# Altium PCB PCB_LICH_VAN_NIEN.PcbDoc
Units mm, origin at the board's own origin, x right, y up, seen from the top; angles counter-clockwise.
Board outline 116.84 x 103.38 mm, 2 copper layers (Top Layer, Bottom Layer); 35 components, 44 nets, 158 pads, 53 vias.
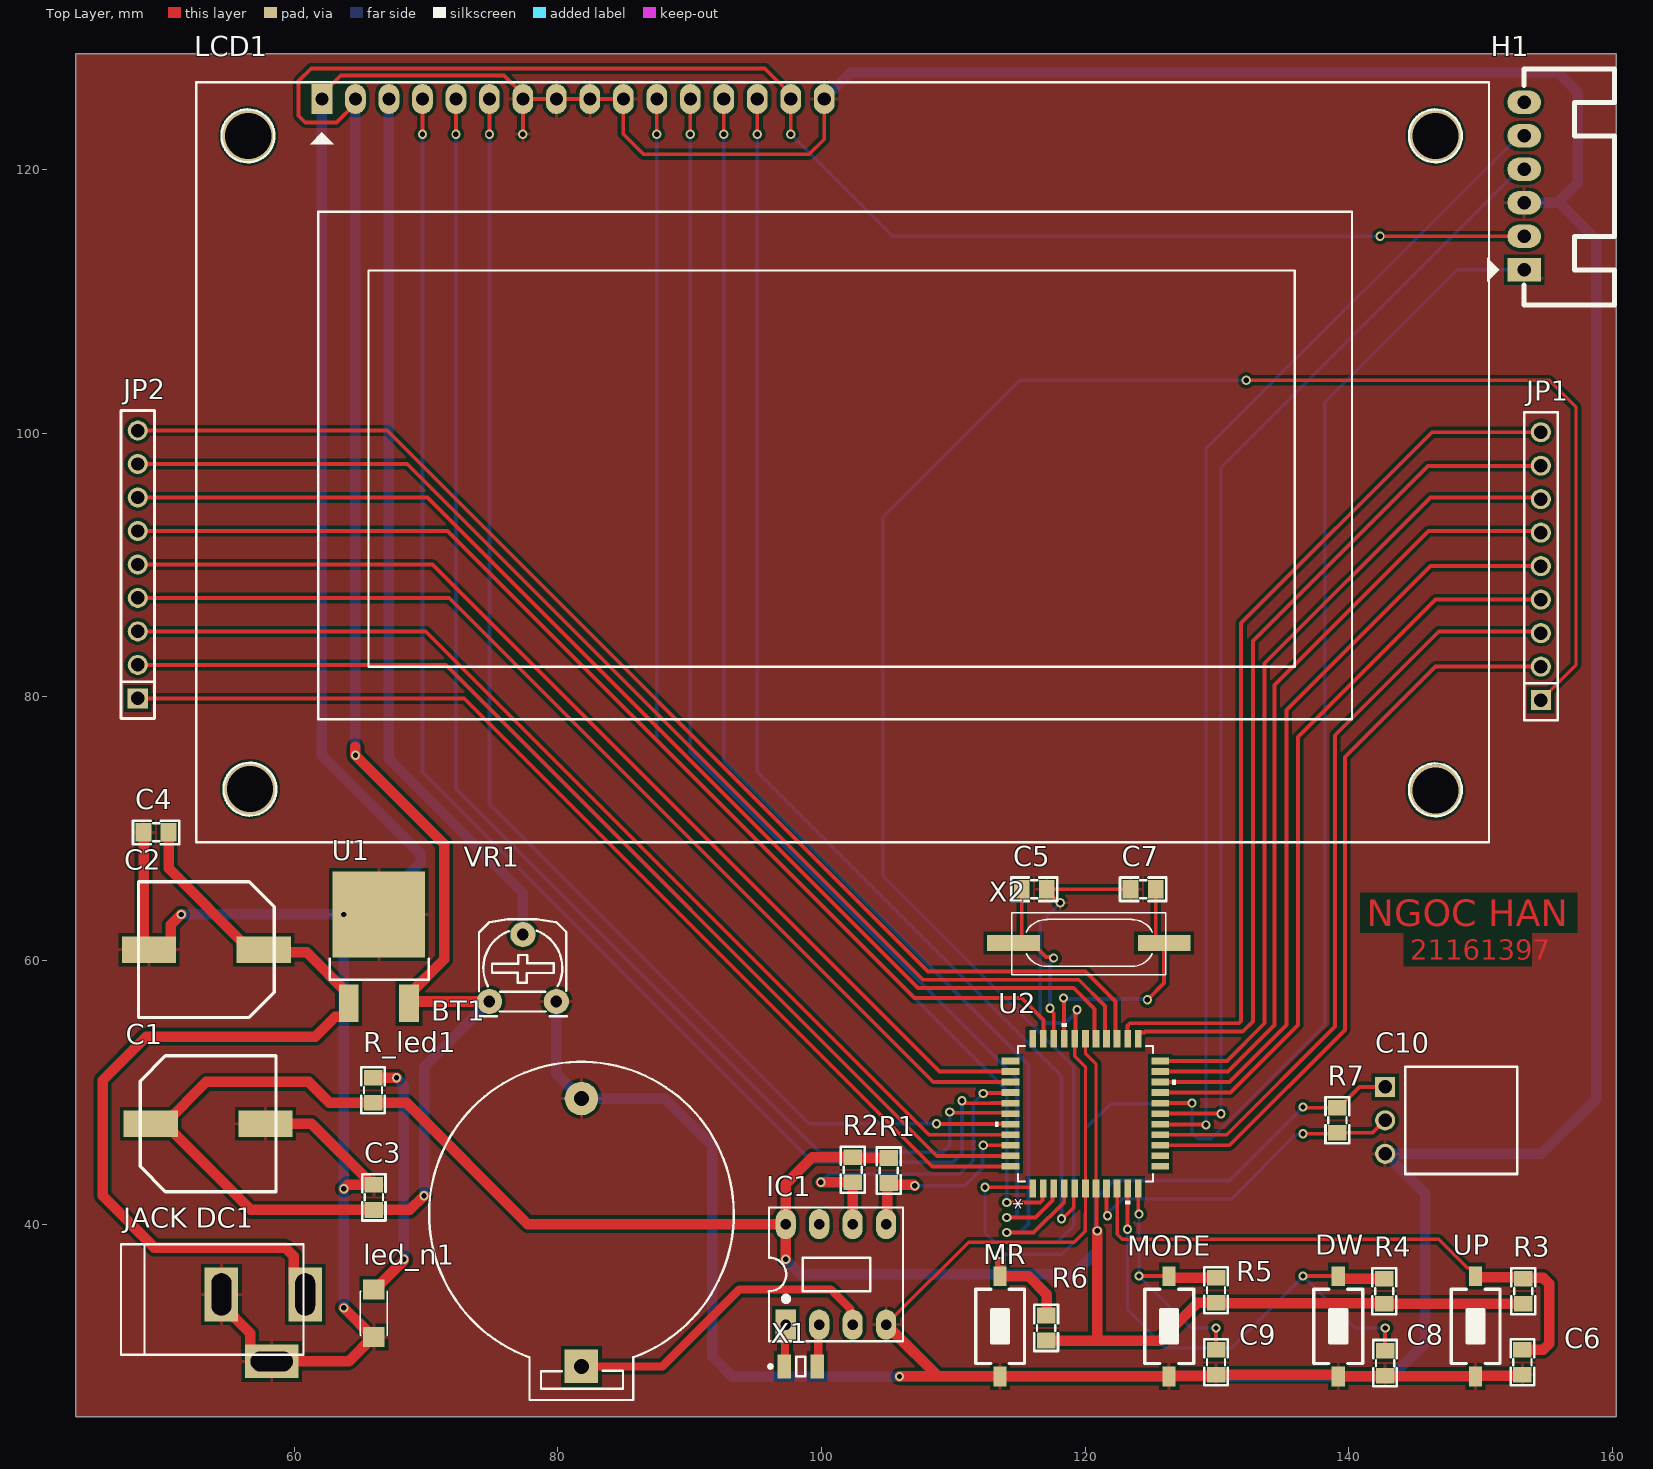
[diagram p0: Top Layer view]
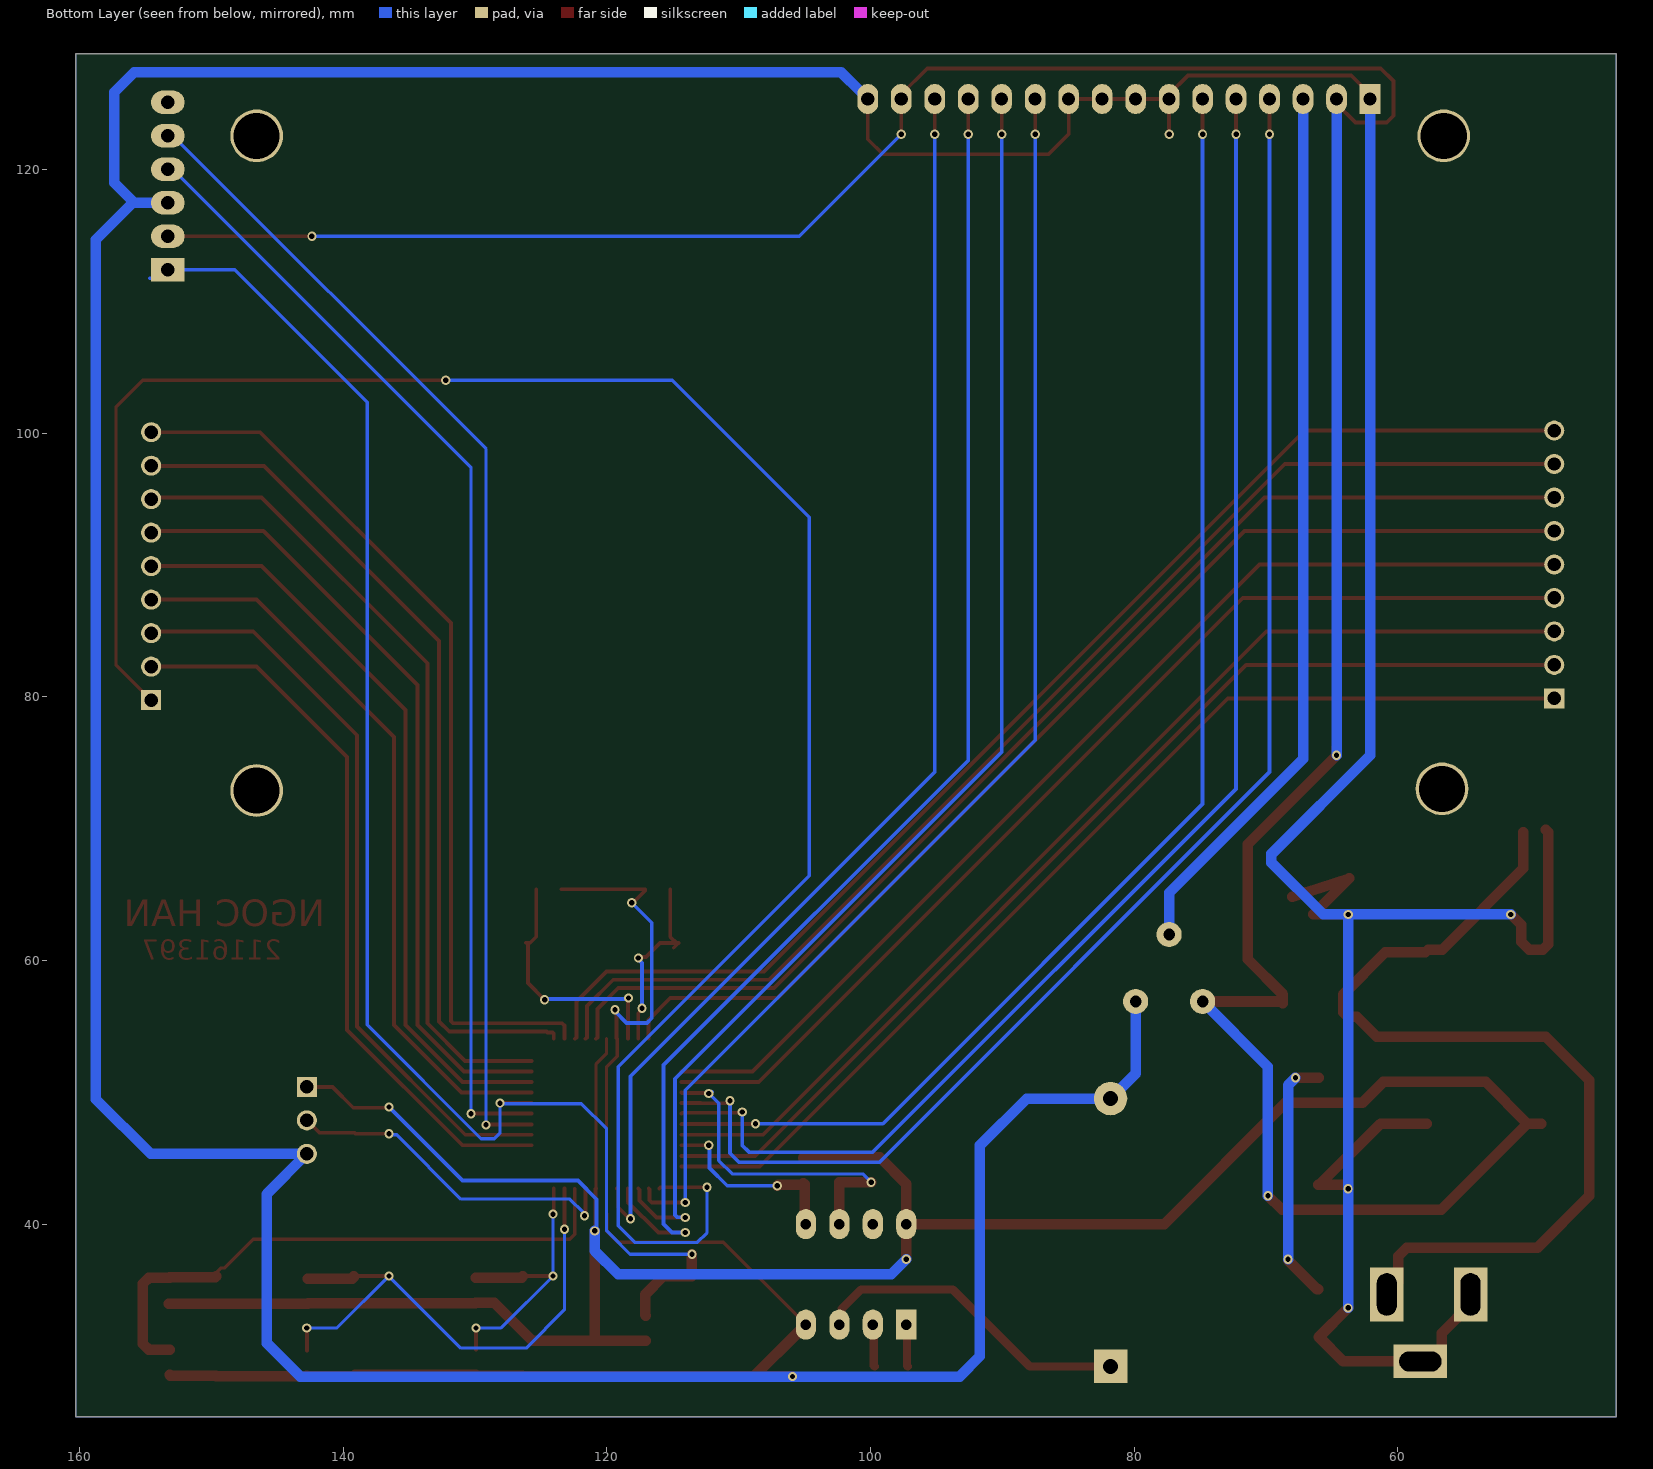
[diagram p1: Bottom Layer view, seen from below]
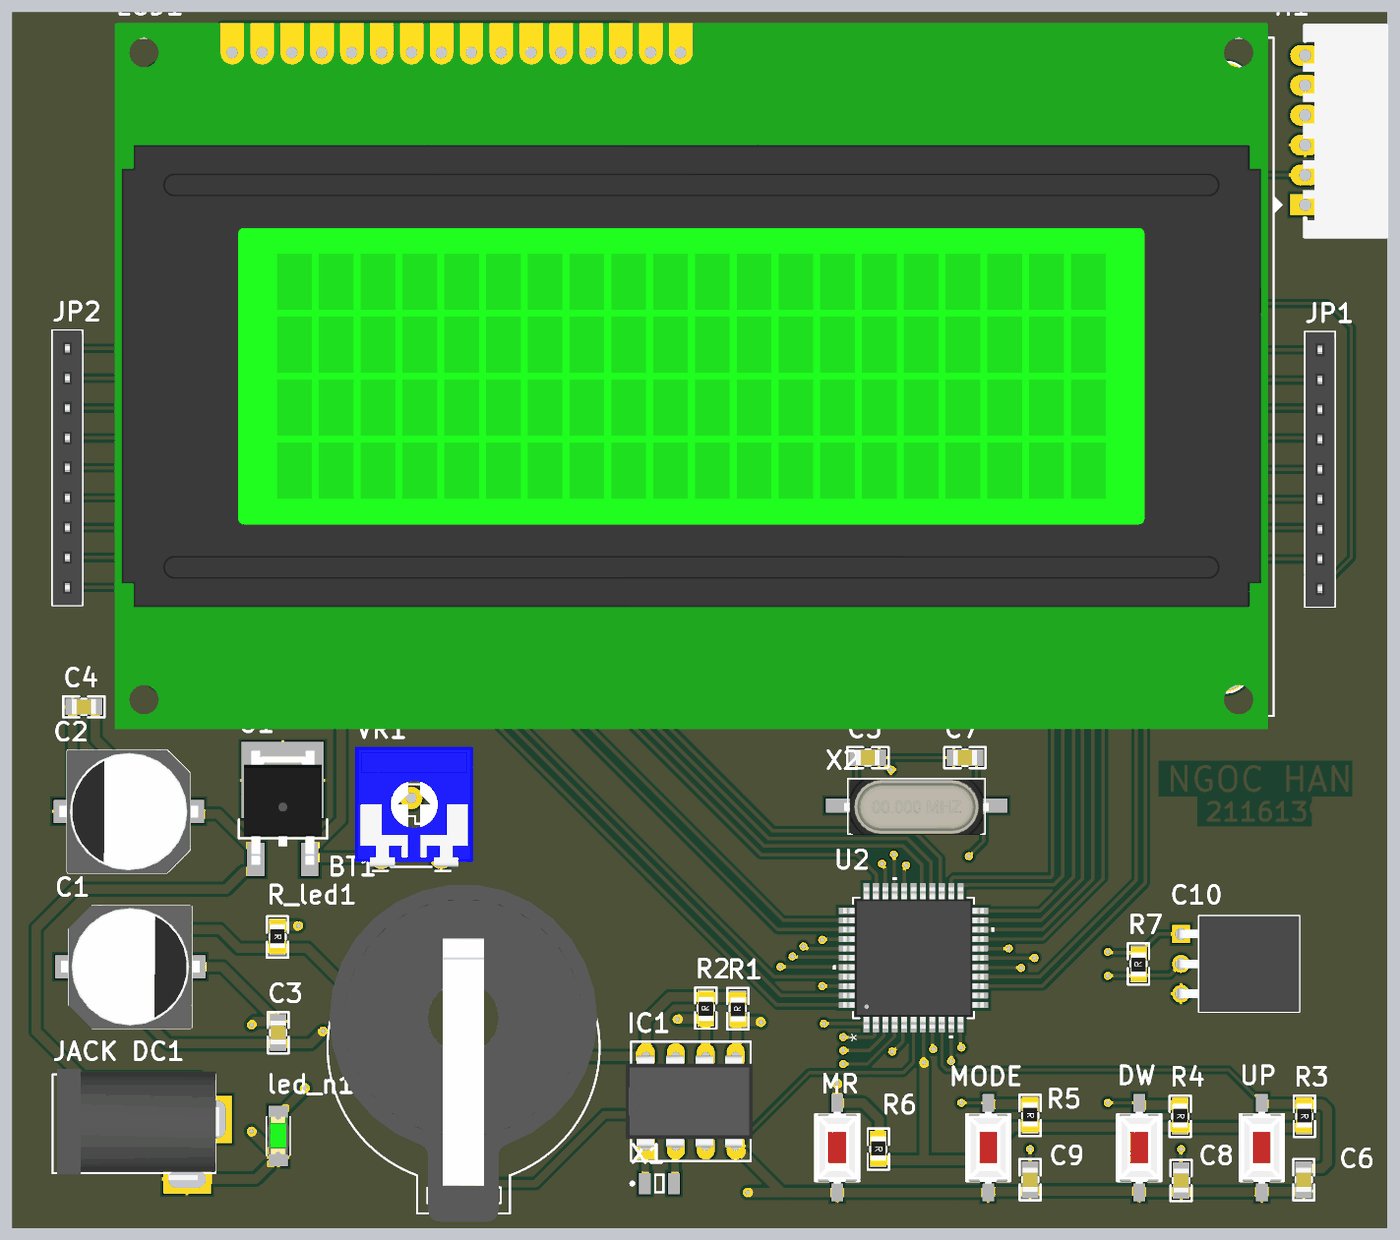
[diagram p2: 3D render of the assembled board from above, using the file's embedded part models]

## Layer stack, top to bottom
Top Solder: solder mask 0.0102, Solder Resist, Dk 3.5
Top Layer: signal copper 0.0356
Dielectric 1: dielectric 0.32, FR-4, Dk 4.8
Bottom Layer: signal copper 0.0356
Bottom Solder: solder mask 0.0102, Solder Resist, Dk 3.5

## Board outline
43.434,25.4 160.274,25.4 160.274,128.778 43.434,128.778

## Design rules (kind name [scope] priority, off if disabled: settings)
Clearance [All] p1: gap=0.254 ignorepadtopadclearanceinfootprint=FALSE
HoleSize [All] p1: absolutevalues=TRUE maxlimit=0.381 minlimit=0.127 maxpercent=80.000 minpercent=20.000
PolygonConnect [All] p1: connectstyle=Relief reliefconductorwidth=0.254 reliefentries=4 polygonreliefangle="90 Angle" airgapwidth=0.254
RoutingVias [All] p1: holewidth=0.4 width=0.7 viastyle="Through Hole" minholewidth=0.4 minwidth=0.7 maxholewidth=0.4 maxwidth=0.7
SolderMaskExpansion [All] p1: expansion=0.102 istentingtop=FALSE
Width [All] p1: maxlimit=0.8 minlimit=0.25 preferedwidth=0.29
29 further rules are at their usual default settings.

## Classes and differential pairs
component class SCH_LICH_VAN_NIEN: BT1 C1 C2 C3 C4 C5 C6 C7 C8 C9 C10 DW H1 H? IC1 "JACK DC1" JP1 JP2 led_n1 MODE MR R1 R2 R3 R4 R5 R6 R7 R_led1 U1 UP X1 X2

## Components (designator, comment, footprint, x,y, rotation, side; value= is the part's Value field where it differs from the comment)
BT1 "PIN 3V" PIN3V 81.788,29.21 r90 top
C1 "1000uF" "tu nhom 10 (G)" 53.467,47.625 r0 top
C2 "1000uF" "tu nhom 10 (G)" 53.34,60.833 r180 top
C3 "104" "tu 0805" 66.04,42.037 r90 top
C4 "104" "tu 0805" 49.53,69.723 r180 top
C5 "104" "tu 0805" 116.135,65.408 r180 top
C6 "104" "tu 0805" 153.165,29.534 r270 top
C7 "104" "tu 0805" 124.39,65.408 r0 top
C8 "104" "tu 0805" 142.748,29.464 r270 top
C9 "104" "tu 0805" 129.924,29.534 r270 top
C10 "DHT11" JP3-C1C 142.748,47.879 r270 top
DW "SW" "BUTTON-SMD 2PIN" 139.192,32.258 r90 top (schematic designator S2)
H1 "Header 6P 2.54 Duc Cong" "Header 6P DC 2.54" 153.289,112.395 r0 top
IC1 "DS1307" DIP8 100.965,36.195 r0 top
"JACK DC1" "JACK DC 5.5" "JACK DC 5.5" 57.658,32.131 r0 top value="Jac DC"
JP1 "JP 1x9 2.54" "JP 1x9 CT" 154.559,89.916 r90 top
JP2 "JP 1x9 2.54" "JP 1x9 CT" 48.133,90.043 r90 top
LCD1 "LCD 20x4A" LCD20X4A 62.103,125.349 r0 top
led_n1 "LED 0805" LED-1206-Green 66.042,35.052 r270 top
MODE "SW" "BUTTON-SMD 2PIN" 126.365,32.258 r90 top (schematic designator S3)
MR "SW" "BUTTON-SMD 2PIN" 113.538,32.258 r90 top (schematic designator S4)
R1 "4.7k" "tro smd 0805" 105.029,44.069 r90 top
R2 "4.7k" "tro smd 0805" 102.301,44.126 r90 top
R3 "4.7k" "tro smd 0805" 153.289,34.925 r270 top
R4 "4.7k" "tro smd 0805" 142.748,34.925 r270 top
R5 "4.7k" "tro smd 0805" 129.982,34.995 r270 top
R6 "4.7k" "tro smd 0805" 117.094,32.131 r270 top
R7 "4.7k" "tro smd 0805" 139.065,47.879 r90 top
R_led1 "1k" "tro smd 0805" 66.04,50.165 r270 top
U1 "L7805CDT-TR" DPAK_118_446_112X59_SMD 66.294,60.773 r90 top
U2 "PIC16F887-IPTVAO" TQFP44_PT_MCH 120.015,48.387 r90 top
UP "SW" "BUTTON-SMD 2PIN" 149.606,32.258 r90 top (schematic designator S1)
VR1 "10k" VR-S2 74.803,56.896 r0 top
X1 "32768hz" XT2-32.768KHz-2_V 98.425,29.21 r0 top value=4Mhz
X2 "20Mhz" XTAL-RU49/4 125.222,61.341 r180 top value=4Mhz

## Footprints (in the part's own frame and the unit in brackets; to place one, negate y for a bottom-side part, rotate by r counter-clockwise, add the part's x,y. Pads: shape width x height; smd on the part's side, far side on the other; paste and mask are expansions set on the pad)
"BUTTON-SMD 2PIN" [mm] "Switch SMD type"
  rect 1.5x1 smd: 1(-3.8,0) 2(3.8,0)
  silkscreen extent -2.82,-1.85 2.82,1.85, body extent -3.05,-1.85 3.05,1.85, height 2.5
DIP8 [mil] "DIP, 8-Leads, Row Spacing 7.62mm, Pitch 2.54mm, Body 9.91x6.73mm"
  rect 60x90 hole 31: 1(-145,-150)
  oval 60x90 hole 31: 2(-45,-150) 3(55,-150) 4(155,-150) 5(155,150) 6(55,150) 7(-45,150) 8(-145,150)
  silkscreen extent -195,-200 205,200, body extent -213,-153 213,153, height 177
DPAK_118_446_112X59_SMD [mm] "CASE: DPAK"
  rect 2.85x1.5 smd: 1(-4.023,2.163) 3(-4.023,-2.417)
  rect 6.5x7 smd: 2(2.727,-0.127)
  silkscreen extent -2.22,-3.9 -0.62,3.6, body extent -4.47,-3.43 5.23,3.15, height 2.3
"Header 6P DC 2.54" [mil]
  rect 100x70 hole 40: 1(0,0)
  oval 100x70 hole 40: 2(0,100) 3(0,200) 4(0,300) 5(0,400) 6(0,500)
  silkscreen extent -110,-105 270,600, body extent -7,-110 278,605, height 227
"JACK DC 5.5" [mm] "Jac DC input"
  rect 2.54x4.064 hole 1.5 slot 3.2 at 90 deg: 1(3.175,2.54) 2(-3.175,2.54)
  rect 4.064x2.54 hole 1.5 slot 3.2 at 0 deg: 3(0.635,-2.54)
  silkscreen extent -10.79,-2.03 3.05,6.35, body extent -10.42,-2.67 3.4,6.84, height 11.02
JP3-C1C [mm] "03p 1 row Right angle"
  rect 1.52x1.52 hole 1.02: 1(-2.54,0)
  round 1.52 hole 1.02: 2(0,0) 3(2.54,0)
  silkscreen extent -4.06,1.52 4.06,10.03, body extent -4.06,-0.25 4.06,10.05, height 2.51
"JP 1x9 CT" [mm] "9 row, straight, gold plating"
  rect 1.52x1.52 hole 1.02: 1(-10.16,0)
  round 1.52 hole 1.02: 2(-7.62,0) 3(-5.08,0) 4(-2.54,0) 5(0,0) 6(2.54,0) 7(5.08,0) 8(7.62,0) 9(10.16,0)
  silkscreen extent -11.68,-1.27 11.68,1.27, body extent -11.68,-1.25 11.68,1.25, height 8.51
LCD20X4A [mil] "LCD dipslay 20x4, 16 pin"
  rect 62x90 hole 39: 1(0,0)
  oval 62x90 hole 39: 2(100,0) 3(200,0) 4(300,0) 5(400,0) 6(500,0) 7(600,0) 8(700,0) 9(800,0) 10(900,0) 11(1000,0) 12(1100,0) 13(1200,0) 14(1300,0) 15(1400,0) 16(1500,0)
  round 157.48 hole 137.8: "Hole 0"(-220,-110) "Hole 0"(-215,-2060) "Hole 0"(3325,-2065) "Hole 0"(3325,-110)
  silkscreen extent -375,-2220 3485,50, body extent -392,-2264 3466,98, height 417
LED-1206-Green [mil]
  rect 60x65 smd: 1(0,0) 2(142,0)
  silkscreen extent 6,-40 136,40, body extent 7,-31 133,32, height 43
PIN3V [mil] "Socket PIN 3V"
  rect 100x100 hole 45: 1(0,0)
  round 100 hole 45: 2(800,0)
  silkscreen extent -100,-455 910,455, body extent -128,-447 1002,449, height 278
TQFP44_PT_MCH [mil]
  rect 53x20 smd paste+0 mask+0: 1(-223.5,157.48) 2(-223.5,125.98) 3(-223.5,94.49) 4(-223.5,62.99) 5(-223.5,31.5) 6(-223.5,0) 7(-223.5,-31.5) 8(-223.5,-62.99) 9(-223.5,-94.49) 10(-223.5,-125.98) 11(-223.5,-157.48) 23(223.5,-157.48) 24(223.5,-125.98) 25(223.5,-94.49) 26(223.5,-62.99) 27(223.5,-31.5) 28(223.5,0) 29(223.5,31.5) 30(223.5,62.99) 31(223.5,94.49) 32(223.5,125.98) 33(223.5,157.48)
  rect 20x53 smd paste+0 mask+0: 12(-157.48,-223.5) 13(-125.98,-223.5) 14(-94.49,-223.5) 15(-62.99,-223.5) 16(-31.5,-223.5) 17(0,-223.5) 18(31.5,-223.5) 19(62.99,-223.5) 20(94.49,-223.5) 21(125.98,-223.5) 22(157.48,-223.5) 34(157.48,223.5) 35(125.98,223.5) 36(94.49,223.5) 37(62.99,223.5) 38(31.5,223.5) 39(0,223.5) 40(-31.5,223.5) 41(-62.99,223.5) 42(-94.49,223.5) 43(-125.98,223.5) 44(-157.48,223.5)
  silkscreen extent -270,-270 270,270, body extent -236,-236 236,236, height 47
"tro smd 0805" [mm]
  rect 1.2x1.4 smd: 1(-0.946,-0.061) 2(0.954,-0.061)
  silkscreen extent -1.75,-0.97 1.75,0.84, body extent -1.56,-0.76 1.44,0.64, height 0.53
"tu 0805" [mm] "Compoment SMD 80x50mil"
  rect 1.2x1.4 smd: 1(-0.946,-0.003) 2(0.954,-0.003)
  silkscreen extent -1.75,-0.89 1.75,0.89, body extent -1.01,-0.64 1.01,0.63, height 0.61
"tu nhom 10 (G)" [mm]
  rect 4.1x2 smd: 1(-4.35,0) 2(4.35,0)
  silkscreen extent -5.15,-5.15 5.15,5.15, body extent -5.9,-5.25 5.9,5.25, height 10.5
VR-S2 [mil] "Resistor Variable"
  round 75 hole 35: 1(0,0) 2(100,200) 3(200,0)
  silkscreen extent -31,-44 231,246, body extent -87,-30 307,372, height 165
XT2-32.768KHz-2_V [mm] "Hand Drawn, 2-Leads, Body 3.2x1.5mm, Pitch 2.5mm"
  rect 1x1.8 smd: 1(-1.25,0) 2(1.25,0)
  silkscreen extent -2.42,-0.75 0.35,0.75, body extent -1.6,-0.75 1.6,0.75, height 0.9
XTAL-RU49/4 [mm]
  rect 4x1.2 smd: 1(-0.762,0) 2(10.668,0)
  silkscreen extent -0.89,-2.29 10.79,2.41, body extent -1.2,-2.22 11.1,2.48, height 4.3

## Part data
BT1: "Battery 3VDC"
C1 C2: library part "Tu Nhom 1000uF 16V", "Dán", Chung_Loai=Dán, Don_Vi=Con, Ma_Hang=MH004419, So_Chan=2, Ten_Linh_Kien="Tụ Nhôm 1000uF 16V 10x10MM"
C3 C4 C5 C6 C7 C8 C9: library part "Tu 0805 104 50V 10%", "Dán", Chung_Loai=Dán, Don_Vi=Con, Ma_Hang=MH004551, So_Chan=2, Ten_Linh_Kien="Tụ 0805 104-100nF 10% 50V"
C10: library part JP3, "WR-PHD 2.54 mm Angled Socket Header", Manufacturer="W¨¹rth Elektronik eiSos GmbH", partNo=613003143121, ComponentLink1 Description=Manufacturer, ComponentLink1URL=http://www.we-online.com, ComponentLink2 Description=Datasheet, ComponentLink2URL=http://katalog.we-online.de/em/datasheet/6130xx143121.pdf, Created by="Karrer Zheng", Created Date="29 March 2013", NoPins=03
DW MODE MR UP: library part SW-Button, "Switch-Button", LatestRevisionDate=17-Jul-2002, LatestRevisionNote="Re-released for DXP Platform.", PackageReference=SPST-2, Published=24-Mar-1999, Publisher="Altium Limited"
H1: "Cắm", Chung_Loai=Cắm, Don_Vi=Con, Ma_Hang=MH003363, Ten_Linh_Kien="Header 6P XH2.54-6P Đực Cong"
IC1: "Real Timer Serial"
JP1 JP2: library part "JP 1x9 2.54 Cai Thang", "Cắm", Chung_Loai=Cắm, Don_Vi=Con, Ma_Hang=MH004006, Ten_Linh_Kien="Jump Đơn Cái 2.54MM 1x20P Thẳng"
LCD1: library part LCD20x4A, "LCD dipslay 20 char, 4 line"
led_n1: library part "LED 1206 Xanh La", "Dán", Chung_Loai=Dán, Don_Vi=Con, Ma_Hang=MH002947, Ten_Linh_Kien="LED1206 Màu Xanh Lá (Green)"
R1 R2 R3 R4 R5 R6 R7 R_led1: library part "Tro 0805 5% 4.7k", "Dán", Chung_Loai=Dán, Don_Vi=Con, Ma_Hang=MH005307, So_Chan=2, Ten_Linh_Kien="Trở 0805 5% 4.7k"
U1: library part REG_35V_5V-1.5A-7.5W-DPAK_2, "Linear Voltage Regulator IC 1 Output 1.5A DPAK", Alternate Part Number-1="CJ7805 3%", Case/Package=DPAK, Manufacturer=Diodes, Manufacturer Part Number=L7805CDT-TR, Supplier Part Number-1=L7805CDT-TR, Supplier-1="SP ROAD"
U2: "No Description Available", Mfr_Name=Microchip, RefDes=RefDes, Type=Type
VR1: library part "Resistor Var"
X1 X2: library part XT2, "Crystal, 32.768 KHz, -40 to 85 degC, 3.2 x 1.5 x 0.9 mm SMD"

## Via types
v1: diameter 0.7, hole 0.4, Top Layer to Bottom Layer, 53 vias

## Nets (pads, with @x,y where several pads share a name; then routed paths per layer and width w, separated by ;. In a path a pad name is that pad's centre, name@x,y a point inside that pad or via, vN(x,y) a via of type N, cw(c..) or ccw(c..) an arc to the next point about the centre after c; other vN are vias at no path point)
CLK: H1.5 U2.16 | length 88.7
  Top Layer w0.29: U2.16 125.717,47.562 129.134,47.562 v1(129.159,47.536)
  Bottom Layer w0.25: v1(129.159,47.536) 129.159,98.806 152.908,122.555 H1.5
DAT: H1.4 U2.17 | length 86
  Top Layer w0.29: U2.17 v1(130.302,48.387)
  Bottom Layer w0.25: v1(130.302,48.387) 130.302,97.409 152.908,120.015 H1.4
DATA: C10.2 R7.1 U2.8 | length 26.2
  Top Layer w0.29: U2.8 121.615,40.715 v1(121.69,40.64) ; v1(136.525,46.863) 139.055,46.863 R7.1 141.802,46.933 C10.2
  Bottom Layer w0.25: v1(121.69,40.64) 121.69,40.762 121.793,40.864 121.793,40.894 122.809,41.91 131.064,41.91 135.931,46.777 136.439,46.777 v1(136.525,46.863)
EN: LCD1.6 U2.40 | length 103.1
  Top Layer w0.29: v1(74.803,122.682) LCD1.6 ; v1(108.712,47.625) 108.731,47.606 114.319,47.606 U2.40
  Bottom Layer w0.29: v1(74.803,122.682) 74.803,71.882 99.06,47.625 v1(108.712,47.625)
GND: "JACK DC1.2" "JACK DC1.3" BT1.2 C1.2 C2.2 C3.2 C4.2 C5.1 C6.2 C7.1 C8.2 C9.2 C10.3 DW.1 H1.3 IC1.4 LCD1.1 LCD1.7 LCD1.8 LCD1.9 LCD1.10 LCD1.16 led_n1.2 MODE.1 MR.1 U1.2 U2.6 U2.29 UP.1 VR1.3 | length 590
  Top Layer w0.254: IC1.4 104.902,32.422 105.489,33.009 105.526,33.009 111.156,38.639 119.157,38.639 119.996,39.478 119.996,40.811 120.015,40.831 U2.6 120.015,51.943 119.215,52.743 U2.29 ; C5.1 117.087,65.405 C7.1
  Top Layer w0.29: LCD1.1 62.103,125.705 63.525,127.127 75.921,127.127 77.343,125.705 LCD1.7 ; v1(77.343,122.682) LCD1.7 ; LCD1.16 100.203,122.301 99.06,121.158 86.487,121.158 84.963,122.682 LCD1.10 LCD1.9 LCD1.8 LCD1.7 ; C5.1 117.08,65.312 118.003,64.389 v1(118.103,64.389) ; U2.29 119.253,54.102 119.253,56.023 119.38,56.15 v1(119.38,56.261)
  Top Layer w0.8: C4.2@48.776,69.926 C4.2 48.576,61.247 C2.2 50.04,60.833 50.64,61.433 50.64,62.705 v1(51.435,63.5) ; 54.483,35.433 54.483,34.671 54.483,33.909 56.661,31.731 56.661,30.461 57.531,29.591 58.293,29.591 64.124,29.591 65.978,31.445 v1(63.768,33.655) ; C1.2 61.31,47.625 C3.2@65.943,42.991 ; v1(63.754,63.5) U1.2 63.691,66.23 66.962,65.171 U1.2@68.004,64.833 ; v1(63.768,42.686) 64.073,42.991 C3.2@65.943,42.991 ; C3.2 C3.2@65.943,42.991 ; IC1.4 104.902,32.2 105.236,31.865 105.422,31.865 108.829,28.458 ; v1(105.918,28.448) 105.928,28.458 108.829,28.458 ; C6.2 153.101,28.519 149.667,28.519 UP.1 149.58,28.484 142.77,28.484 C8.2 142.719,28.484 139.218,28.484 DW.1 139.192,28.48 139.092,28.58 C9.2 129.86,28.519 126.426,28.519 MODE.1 MR.1 108.829,28.458
  Bottom Layer w0.29: v1(118.103,64.389) 116.586,62.872 116.586,55.626 116.954,55.258 118.504,55.258 118.891,55.645 118.891,55.661 119.38,56.15 v1(119.38,56.261)
  Bottom Layer w0.8: v1(51.435,63.5) v1(63.754,63.5) ; LCD1.1 62.103,75.565 69.582,68.086 69.582,67.423 65.659,63.5 v1(63.754,63.5) ; v1(63.768,33.655) v1(63.768,42.686) 63.768,63.486 v1(63.754,63.5) ; VR1.3 79.883,51.435 BT1.2 88.138,49.53 91.694,45.974 91.694,29.972 93.218,28.448 v1(105.918,28.448) 143.256,28.448 145.796,30.988 145.796,42.291 C10.3 154.598,45.339 158.75,49.491 158.75,114.681 155.956,117.475 155.829,117.475 ; LCD1.16 100.203,125.495 100.561,125.853 100.707,125.853 102.235,127.381 155.829,127.381 157.353,125.857 157.353,118.999 155.829,117.475 ; H1.3 155.829,117.475
MCLR: H1.1 MR.2 R6.1 U2.18 | length 118
  Top Layer w0.29: U2.18 v1(128.105,49.187)
  Top Layer w0.8: v1(113.538,37.719) MR.2 115.707,36.058 117.094,34.671 117.094,33.137 R6.1
  Bottom Layer w0.25: v1(113.538,37.719) 118.237,37.719 119.634,39.116 120.015,39.497 120.015,47.244 121.92,49.149 128.067,49.149 v1(128.105,49.187) 128.105,46.901 128.524,46.482 129.54,46.482 138.176,55.118 138.176,102.362 148.209,112.395 H1.1 153.924,111.76 154.686,111.76
NetBT1_1: BT1.1 IC1.3 | length 24.7
  Top Layer w0.635: BT1.1 87.916,29.21 93.758,35.052 100.711,35.052 102.192,33.571 102.192,32.555 IC1.3
NetC2_1: "JACK DC1.1" C2.1 C4.1 U1.1 | length 71.7
  Top Layer w0.8: C4.1 50.476,66.997 56.64,60.833 C2.1 57.907,60.616 60.94,60.616 64.131,57.425 U1.1 64.131,56.075 63.781,55.725 63.106,55.725 61.61,54.229 48.768,54.229 45.466,50.927 45.466,42.164 49.403,38.227 59.309,38.227 59.963,37.573 59.963,35.541 60.833,34.671 60.833,35.433
NetC5_2: C5.2 U2.31 X2.2 | length 15.3
  Top Layer w0.254: X2.2 X2.2@114.935,60.96 ; X2.2@114.707,61.341 115.18,61.814 C5.2 ; X2.2@114.738,61.344 X2.2@115.18,61.787
  Top Layer w0.29: X2.2 114.707,61.341 115.954,61.341 117.019,60.276 117.524,60.276 v1(117.602,60.198) ; v1(117.335,56.388) 117.335,56.277 117.609,56.004 117.609,54.07 U2.31
  Bottom Layer w0.29: v1(117.335,56.388) 117.335,59.82 117.602,60.087 v1(117.602,60.198)
NetC6_1: C6.1 R3.1 U2.9 UP.2 | length 44.7
  Top Layer w0.254: U2.9 122.421,42.704 122.421,39.25 122.809,38.862 146.802,38.862 148.983,36.681 149.233,36.681 149.606,36.308 UP.2
  Top Layer w0.8: UP.2 149.7,35.964 153.134,35.964 153.158,35.941 154.725,35.941 155.194,35.472 155.194,30.949 154.725,30.48 C6.1
NetC7_2: C7.2 U2.30 X2.1 | length 19
  Top Layer w0.254: C7.2 125.344,61.814 125.817,61.341 X2.1 ; X2.1@125.984,61.344 X2.1@126.168,61.344
  Top Layer w0.29: v1(118.351,57.163) 118.383,57.131 118.383,54.096 U2.30 ; v1(124.714,57.023) 125.984,58.293 X2.1
  Bottom Layer w0.29: v1(118.351,57.163) 118.421,57.093 124.644,57.093 v1(124.714,57.023)
NetC8_1: C8.1 DW.2 R4.1 U2.10 | length 41.9
  Top Layer w0.29: v1(123.21,39.613) 123.213,39.616 123.213,42.708 U2.10 ; v1(136.525,36.068) 139.182,36.068 DW.2 ; C8.1 142.748,30.413 v1(142.748,32.131)
  Top Layer w0.8: DW.2 139.192,35.971 139.292,35.871 R4.1
  Bottom Layer w0.25: v1(123.21,39.613) 123.21,33.508 126.111,30.607 131.064,30.607 v1(136.525,36.068) 140.462,32.131 v1(142.748,32.131)
NetC9_1: C9.1 MODE.2 R5.1 U2.11 | length 21.7
  Top Layer w0.29: U2.11 124.015,40.831 v1(124.079,40.767) ; v1(124.079,36.068) 126.355,36.068 MODE.2 ; C9.1 v1(129.921,32.131)
  Top Layer w0.8: MODE.2 126.365,36.041 126.465,35.941 R5.1
  Bottom Layer w0.25: v1(124.079,40.767) v1(124.079,36.068) 128.016,32.131 v1(129.921,32.131)
NetIC1_1: IC1.1 X1.1 | length 3.2
  Top Layer w0.635: X1.1 97.229,29.263 97.229,32.332 IC1.1
NetIC1_2: IC1.2 X1.2 | length 3.2
  Top Layer w0.635: X1.2 99.748,29.284 99.748,32.311 IC1.2
NetLCD1_3: LCD1.3 VR1.2 | length 67.6
  Bottom Layer w0.8: LCD1.3 67.183,75.311 77.343,65.151 VR1.2
NetLCD1_11: LCD1.11 U2.2 | length 98.4
  Top Layer w0.29: v1(87.503,122.682) LCD1.11 ; v1(114.046,41.656) 115.578,41.656 115.596,41.638 116.568,41.638 116.746,41.816 116.746,42.642 U2.2
  Bottom Layer w0.29: v1(87.503,122.682) 87.503,76.708 114.046,50.165 v1(114.046,41.656)
NetLCD1_12: LCD1.12 U2.3 | length 100.7
  Top Layer w0.29: v1(90.043,122.682) LCD1.12 ; v1(114.046,40.513) 116.229,40.513 117.506,41.79 117.506,42.601 U2.3
  Bottom Layer w0.29: v1(90.043,122.682) 90.043,75.819 114.831,51.031 114.831,40.706 114.661,40.536 114.069,40.536 v1(114.046,40.513)
NetLCD1_13: LCD1.13 U2.4 | length 103.2
  Top Layer w0.29: v1(92.583,122.682) LCD1.13 ; v1(114.046,39.37) 116.086,39.37 118.415,41.699 U2.4
  Bottom Layer w0.29: v1(92.583,122.682) 92.583,75.184 115.697,52.07 115.697,40.005 115.062,39.37 v1(114.046,39.37)
NetLCD1_14: LCD1.14 U2.5 | length 97.2
  Top Layer w0.29: v1(95.123,122.682) LCD1.14 ; v1(118.199,40.424) 118.291,40.424 119.126,41.259 119.126,42.621 U2.5
  Bottom Layer w0.29: v1(95.123,122.682) 95.123,74.295 118.199,51.219 v1(118.199,40.424)
Netled_n1_1: led_n1.1 R_led1.1 | length 19.1
  Top Layer w0.8: R_led1.1 v1(67.761,51.111) ; led_n1.1 66.105,35.052 68.326,37.273 v1(68.326,37.336)
  Bottom Layer w0.8: v1(67.761,51.111) 68.326,50.546 v1(68.326,37.336)
RA0: JP1.4 U2.19 | length 57.2
  Top Layer w0.29: U2.19 131.013,49.987 136.144,55.118 136.144,76.962 146.558,87.376 JP1.4
RA1: JP1.5 U2.20 | length 59.1
  Top Layer w0.29: U2.20 130.939,50.787 135.255,55.103 135.255,78.994 146.184,89.923 154.552,89.923 JP1.5
RA2: JP1.6 U2.21 | length 61
  Top Layer w0.29: U2.21 130.835,51.587 134.366,55.118 134.366,80.899 146.05,92.583 154.432,92.583 JP1.6
RA3: JP1.7 U2.22 | length 62.6
  Top Layer w0.29: U2.22 130.746,52.387 133.604,55.245 133.604,82.55 146.177,95.123 154.432,95.123 JP1.7
RA4: JP1.8 U2.23 | length 65.7
  Top Layer w0.29: U2.23 124.015,54.436 124.124,54.545 124.496,54.545 124.561,54.61 131.953,54.61 132.715,55.372 132.715,84.228 146.001,97.514 154.537,97.514 JP1.8
RA5: JP1.9 U2.24 | length 68.7
  Top Layer w0.29: U2.24 123.215,55.075 123.385,55.245 131.656,55.245 131.826,55.415 131.826,85.598 146.304,100.076 JP1.9
RB4: JP1.2 U2.14 | length 56
  Top Layer w0.29: U2.14 130.95,45.987 139.7,54.737 139.7,75.438 146.558,82.296 JP1.2
RB5: JP1.3 U2.15 | length 57.7
  Top Layer w0.29: U2.15 130.734,46.787 138.938,54.991 138.938,77.089 146.812,84.963 154.432,84.963 JP1.3
RC0: JP2.6 U2.32 | length 85.5
  Top Layer w0.29: JP2.6 71.628,92.583 107.061,57.15 115.189,57.15 116.84,55.499 116.84,54.089 U2.32
RC1: JP2.5 U2.35 | length 82.1
  Top Layer w0.29: JP2.5 70.485,90.043 108.941,51.587 U2.35
RC2: JP2.4 U2.36 | length 81.4
  Top Layer w0.29: JP2.4 71.755,87.503 108.471,50.787 U2.36
RC5: JP2.2 U2.43 | length 81.6
  Top Layer w0.29: JP2.2 71.501,82.423 108.737,45.187 U2.43
RC6: JP2.1 U2.44 | length 80.9
  Top Layer w0.29: JP2.1 72.898,79.883 108.394,44.387 U2.44
RC7: JP1.1 U2.1 | length 155.5
  Top Layer w0.25: v1(132.207,104.013) 155.194,104.013 157.226,101.981 157.226,82.423 JP1.1
  Top Layer w0.29: v1(112.395,42.799) 115.926,42.799 U2.1
  Bottom Layer w0.25: v1(112.395,42.799) 112.395,39.37 113.157,38.608 117.856,38.608 119.126,39.878 119.126,51.943 104.648,66.421 104.648,93.631 115.03,104.013 v1(132.207,104.013)
RD3: JP2.3 U2.41 | length 82
  Top Layer w0.29: JP2.3 69.977,84.963 108.153,46.787 U2.41
RE0: JP2.9 U2.25 | length 95
  Top Layer w0.29: JP2.9 67.056,100.203 108.077,59.182 120.015,59.182 122.306,56.891 122.306,54.173 U2.25
RE1: JP2.8 U2.26 | length 92.9
  Top Layer w0.29: JP2.8 68.58,97.663 107.696,58.547 119.507,58.547 121.506,56.548 121.506,54.173 U2.26
RE2: JP2.7 U2.27 | length 91
  Top Layer w0.29: JP2.7 70.104,95.123 107.315,57.912 119.126,57.912 120.706,56.332 120.706,54.173 U2.27
RS: LCD1.4 U2.38 | length 112.3
  Top Layer w0.29: v1(69.723,122.682) LCD1.4 ; v1(110.661,49.359) 110.771,49.359 110.956,49.175 112.878,49.175 112.89,49.187 U2.38
  Bottom Layer w0.29: v1(69.723,122.682) 69.723,74.295 99.314,44.704 109.982,44.704 110.661,45.383 v1(110.661,49.359)
RW: LCD1.5 U2.39 | length 108.6
  Top Layer w0.29: v1(72.263,122.682) LCD1.5 ; v1(109.728,48.514) 109.791,48.45 114.275,48.45 U2.39
  Bottom Layer w0.29: v1(72.263,122.682) 72.263,73.025 99.822,45.466 109.22,45.466 109.728,45.974 v1(109.728,48.514)
SCL: IC1.6 R2.1 U2.37 | length 25.7
  Top Layer w0.29: v1(112.268,49.924) 112.305,49.961 114.313,49.961 U2.37
  Top Layer w0.8: v1(99.949,43.18) R2.1 IC1.6
  Bottom Layer w0.25: v1(99.949,43.18) 100.584,43.815 110.49,43.815 111.506,44.831 111.506,49.174 112.256,49.924 v1(112.268,49.924)
  Bottom Layer w0.29: v1@112.001,50.051 112.03,50.051 112.157,49.924 v1(112.268,49.924)
SDA: IC1.5 R1.1 U2.42 | length 14.8
  Top Layer w0.29: v1(112.268,45.987) U2.42
  Top Layer w0.8: IC1.5 104.996,40.099 104.996,43.03 R1.1 105.216,42.997 106.99,42.997 v1(107.068,42.919)
  Bottom Layer w0.29: v1(107.068,42.919) 110.864,42.919 112.2,44.255 112.2,45.919 v1(112.268,45.987)
VCC: C1.1 C3.1 C10.1 H1.2 IC1.8 LCD1.2 LCD1.15 R1.2 R2.2 R3.2 R4.2 R5.2 R6.2 R7.2 R_led1.2 U1.3 U2.7 U2.28 VR1.1 | length 410.3
  Top Layer w0.25: v1(142.367,114.935) H1.2
  Top Layer w0.254: U2.28 120.015,52.959 120.815,52.159 U2.7
  Top Layer w0.29: LCD1.2 64.643,124.993 63.221,123.571 60.833,123.571 60.325,124.079 60.325,126.703 61.293,127.671 95.697,127.671 97.663,125.705 LCD1.15 v1(97.663,122.682) ; U2.7 120.859,42.666 120.859,39.542 v1(120.904,39.497) ; v1(136.525,48.895) 136.587,48.833 R7.2 139.226,48.833 140.811,50.419 C10.1
  Top Layer w0.8: C1.1 C1.1@50.167,47.625 ; 64.643,76.2 v1(64.643,75.565) 71.374,68.834 71.374,60.088 68.711,57.425 U1.3 68.857,56.896 VR1.1 ; v1(69.85,42.164) 68.777,41.091 C3.1 56.701,41.091 C1.1@50.167,47.625 ; v1(97.282,37.338) IC1.8 ; R1.2 105.061,45.052 102.39,45.052 R2.2 99.309,45.08 97.282,43.053 IC1.8 ; R6.2 120.904,31.177 ; v1(120.904,39.497) 120.904,31.177 ; R3.2 R4.2 142.652,34.006 129.956,34.006 R5.2 129.916,34.036 128.524,34.036 125.665,31.177 120.904,31.177 ; C1.1@50.167,47.625 53.342,50.8 61.087,50.8 62.676,49.211 R_led1.2 68.518,49.211 77.724,40.005 IC1.8
  Bottom Layer w0.25: v1(97.663,122.682) 105.41,114.935 v1(142.367,114.935)
  Bottom Layer w0.29: 120.777,39.872 120.777,41.894 122.19,43.307 130.937,43.307 v1(136.525,48.895)
  Bottom Layer w0.8: v1(64.643,75.565) LCD1.2 ; v1(69.85,42.164) 69.85,51.943 VR1.1 ; v1(97.282,37.338) 98.425,36.195 119.126,36.195 120.904,37.973 v1(120.904,39.497)
pads on no net: "LCD1.Hole 0" H1.6 IC1.7 U2.12 U2.13 U2.33 U2.34

## Polygon pours and split planes (outlines as drawn)
GND on Top Layer "GND_L01_P000" (solid, pour order 0): 43.434,128.778 160.274,128.778 160.274,25.4 43.434,25.4
GND on Bottom Layer "GND_L02_P001" (solid, pour order 1): 43.434,128.778 160.274,128.778 160.274,25.4 43.434,25.4

## Other copper
Top Layer:
  text "NGOC HAN" at 141.351,62.611 h2.02
  text "21161397" at 144.653,60.071 h1.52

## Text inside footprints (layer, text, board x,y; h text height)
U2: Top Overlay "*" at 115.869,41.084 h1.27 r90; Mechanical 13 "*" at 116.25,43.447 h1.27 r90